# EAGLE board KallaxScreen (EAGLE 8.3.1)
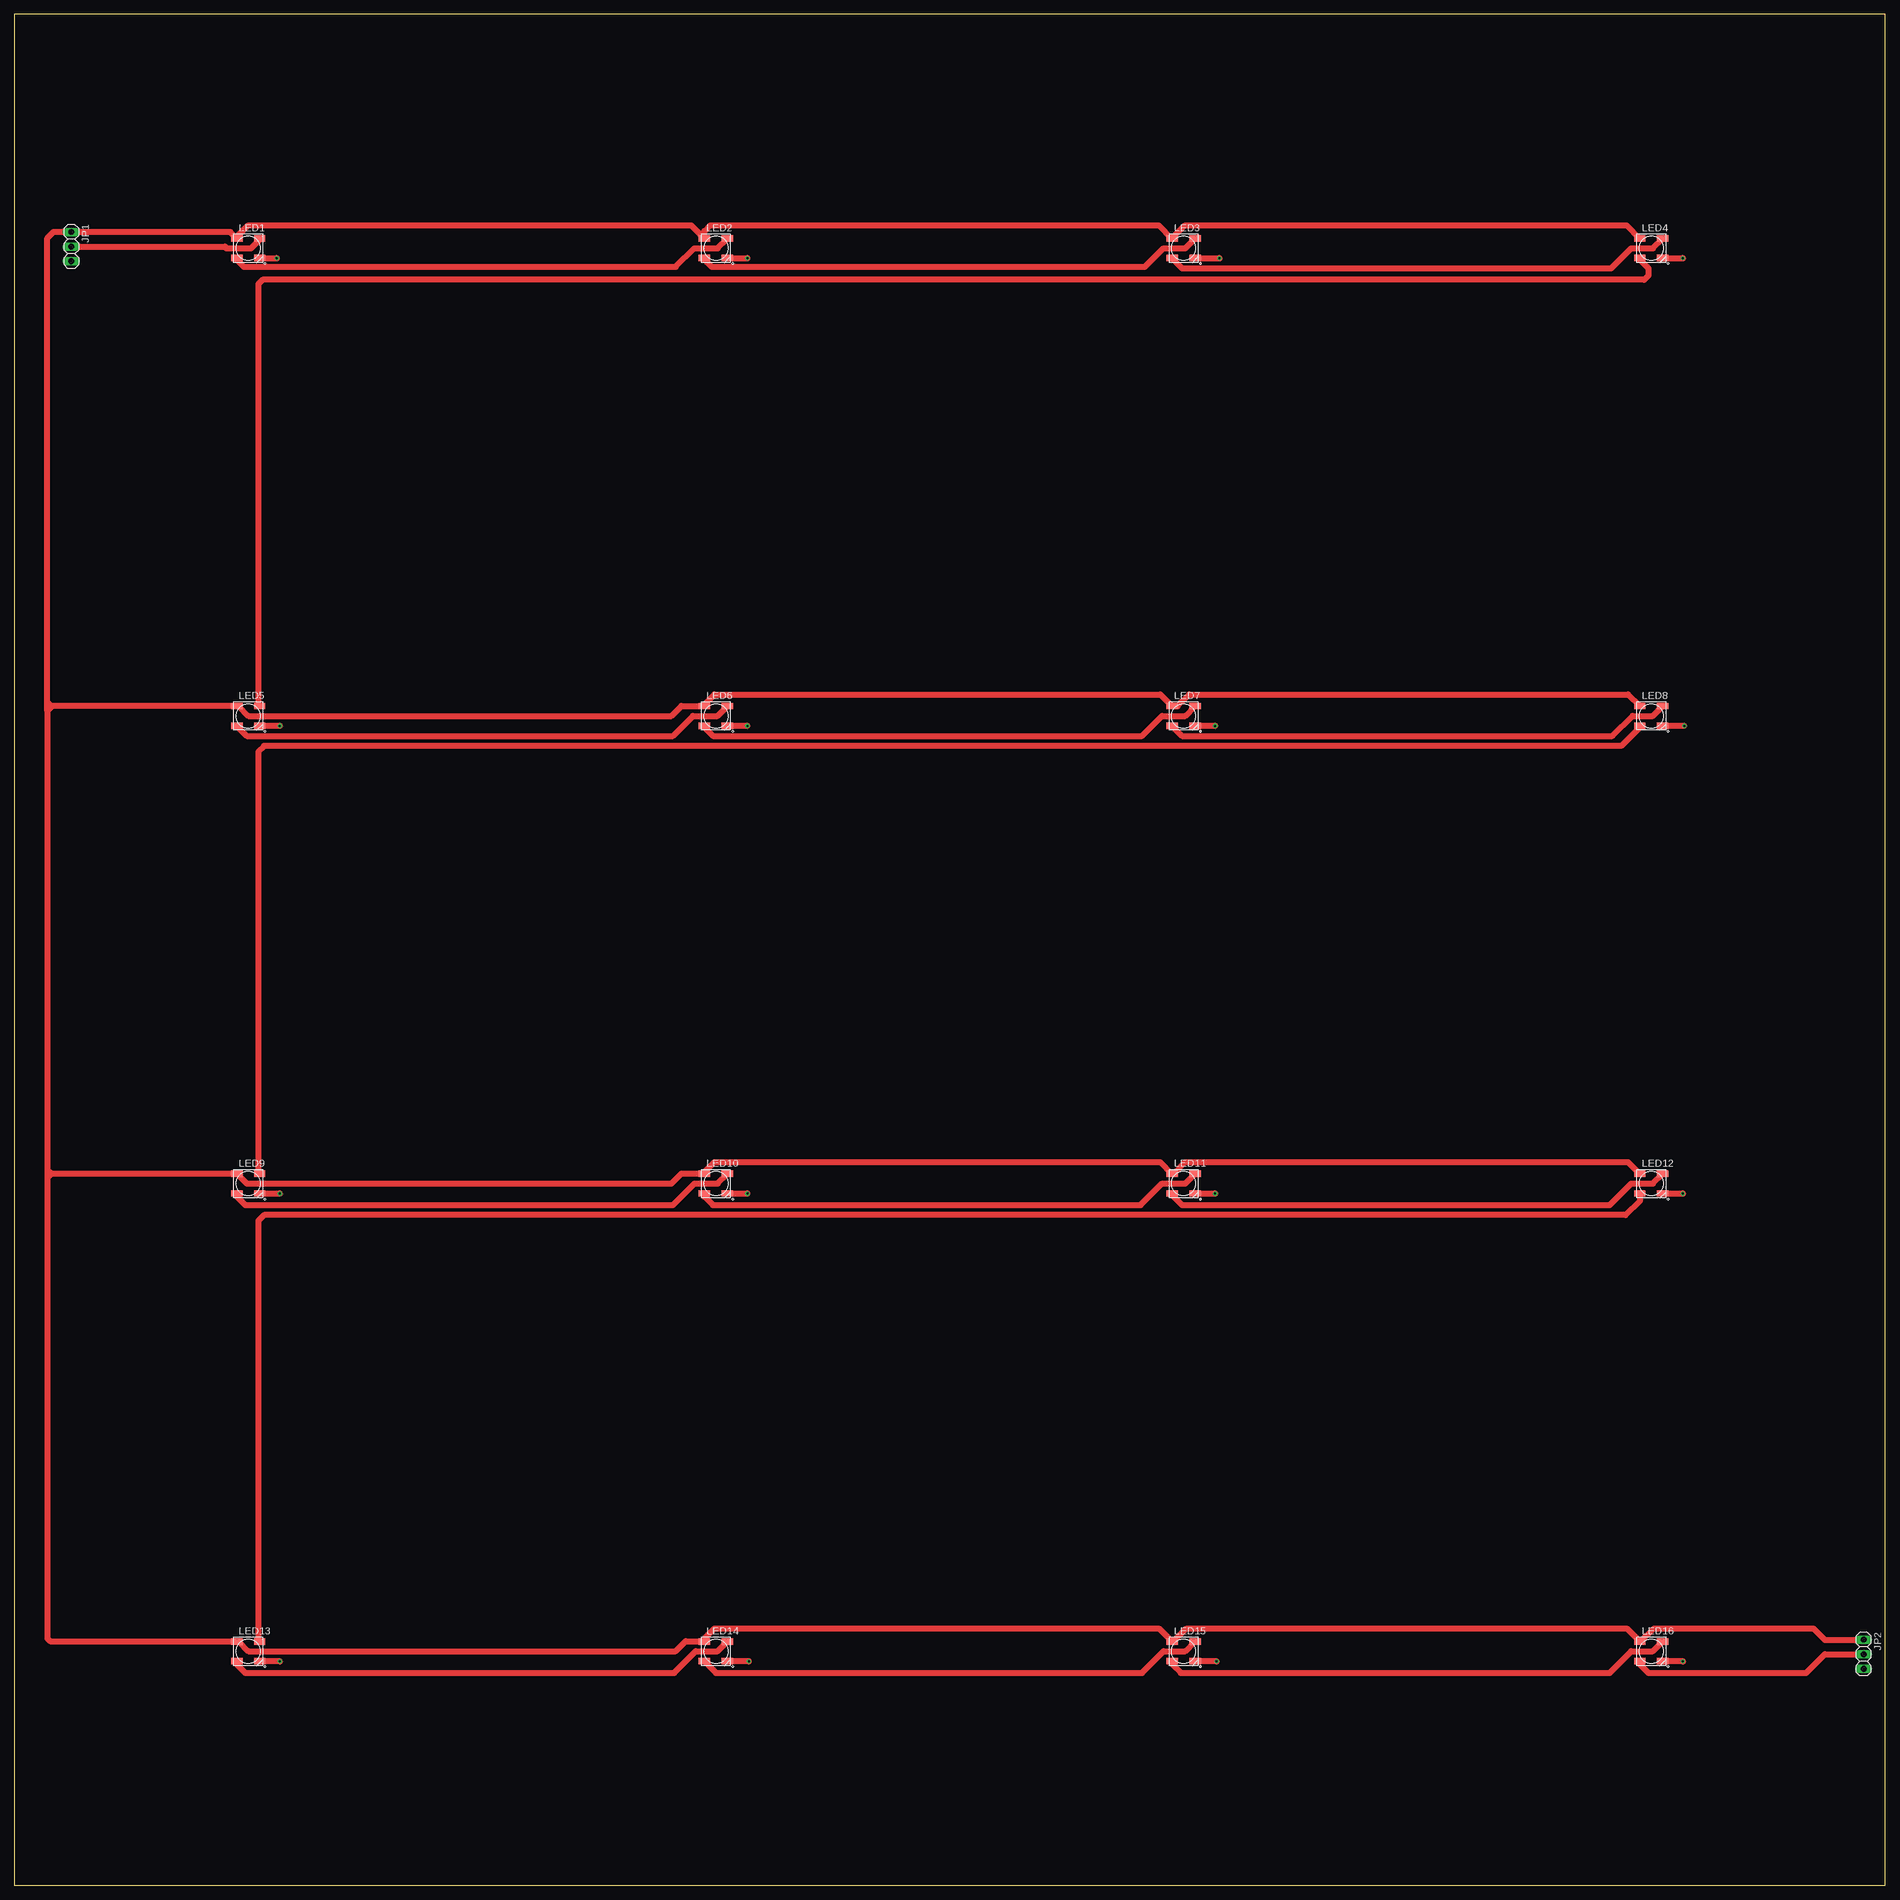
[diagram p0: board, top side]
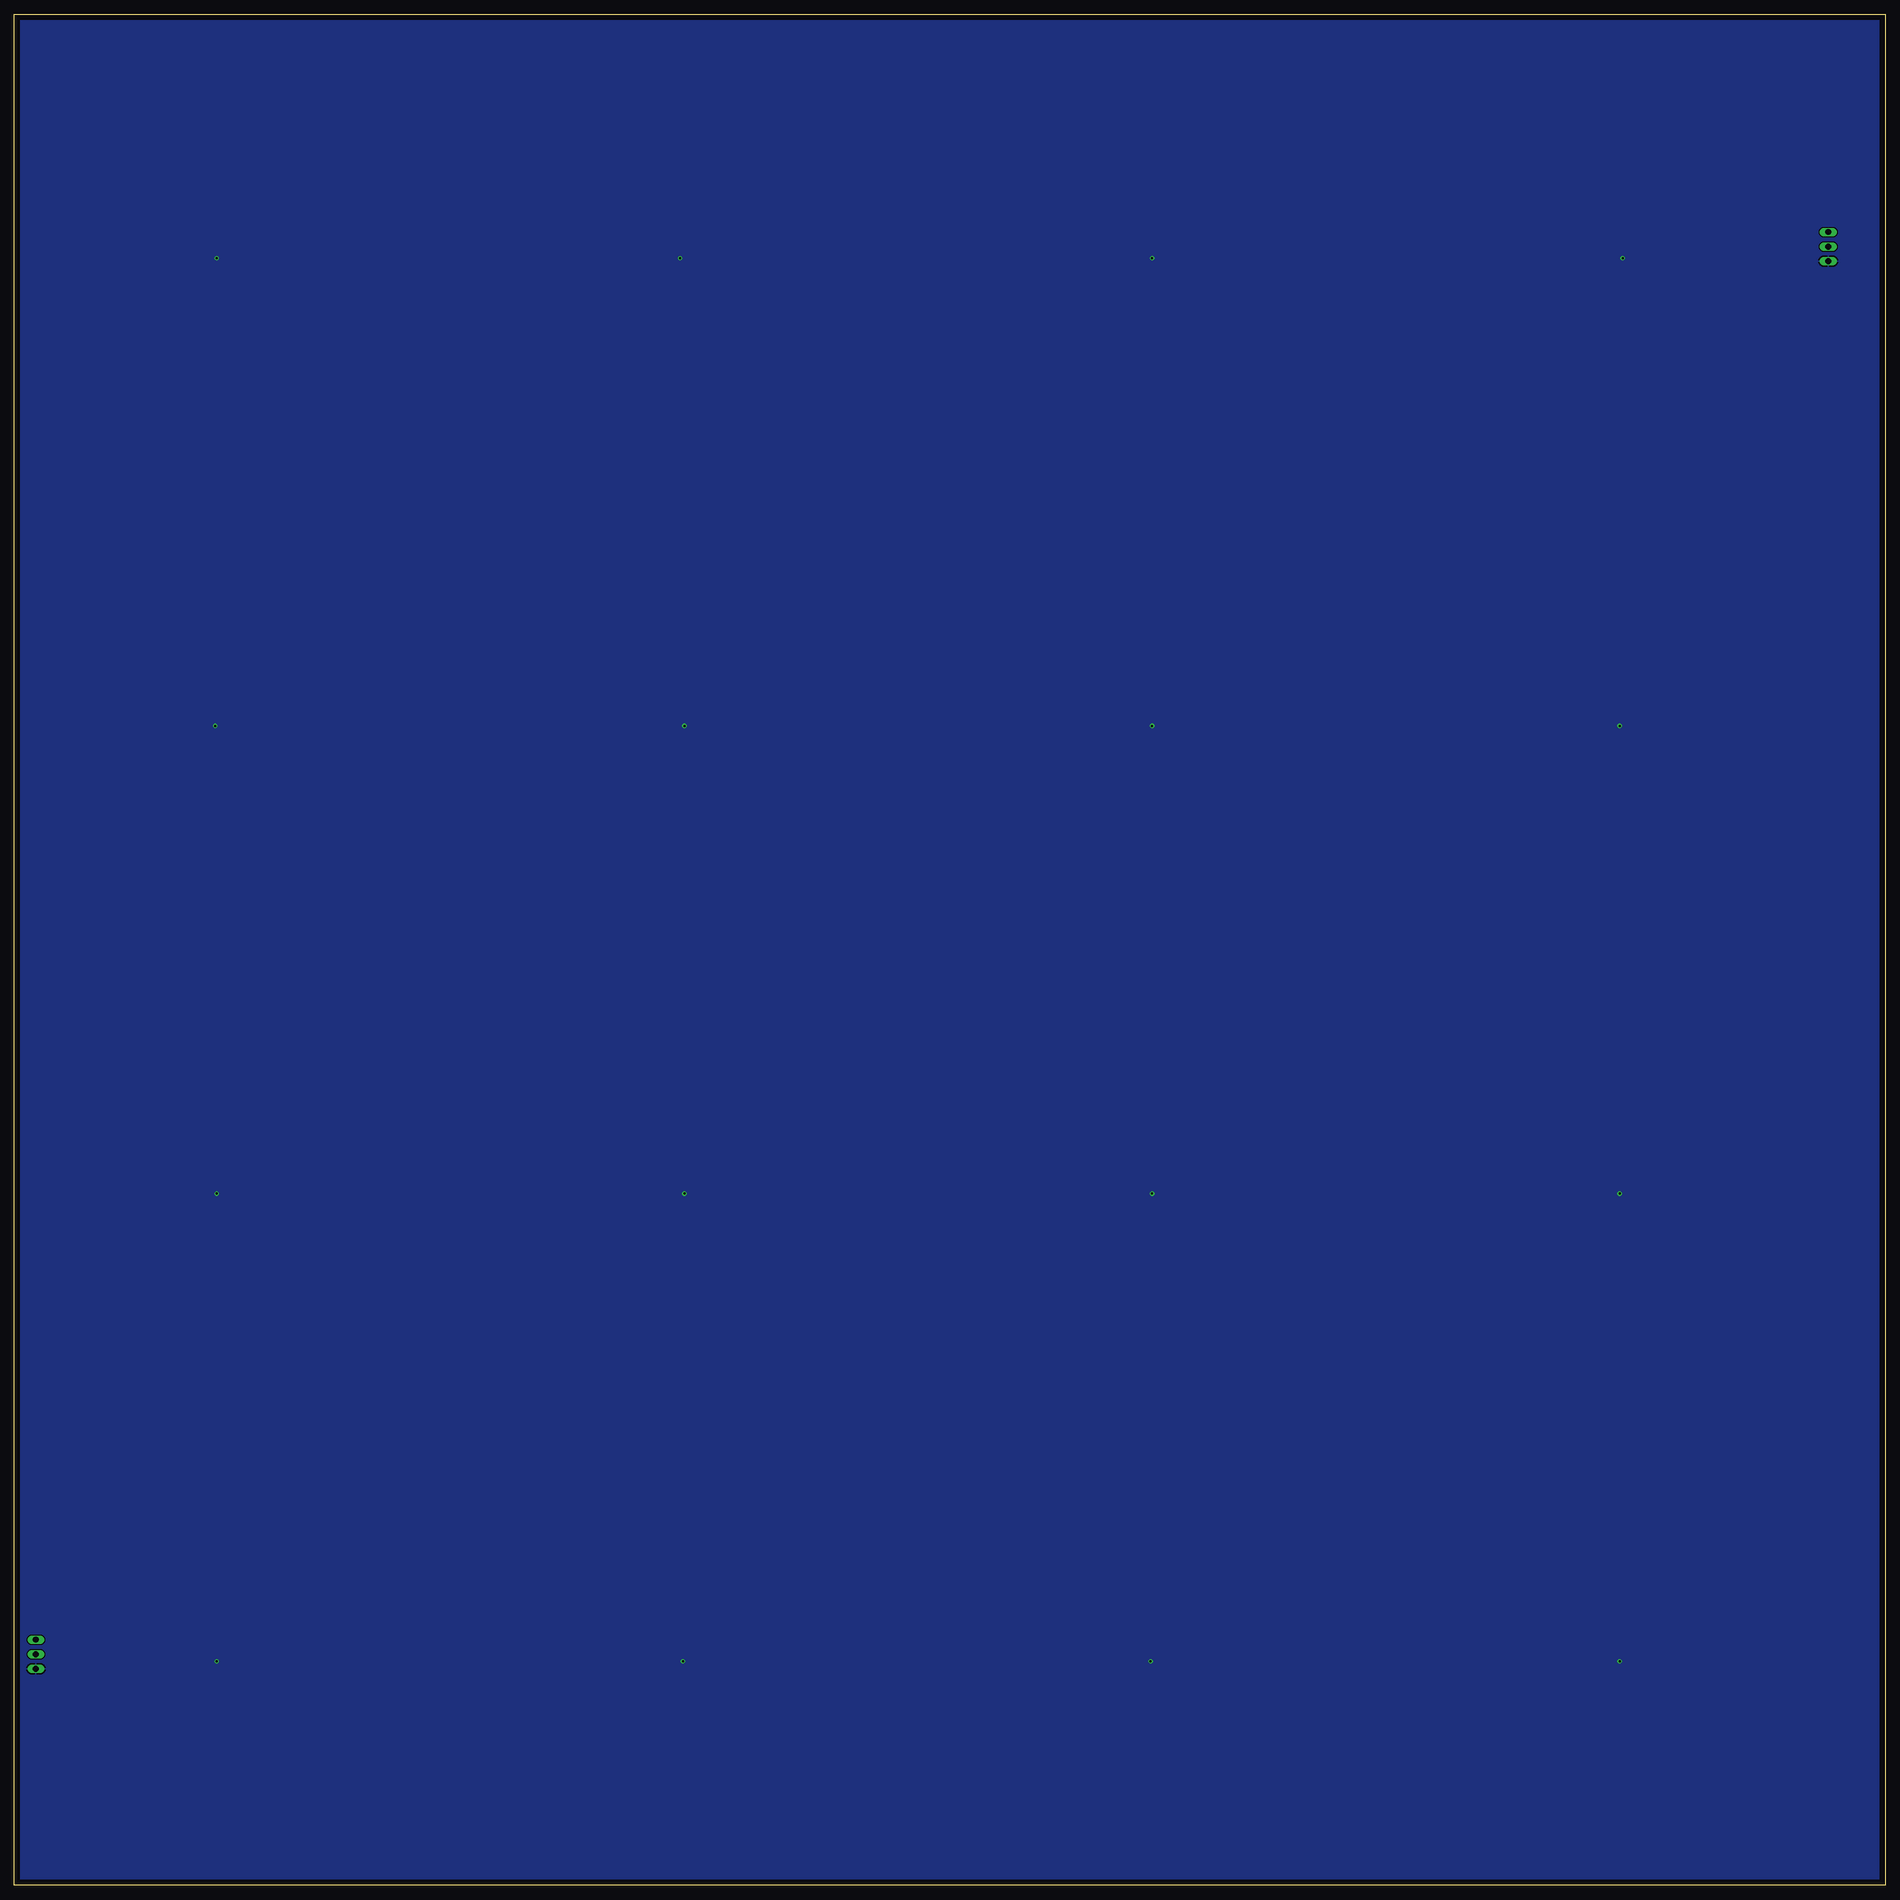
[diagram p1: board, bottom side, seen from below]

Size 326 x 326 mm. Coordinates in mm from the lower left corner, seen from the top.
Outline: 0,0 326,0 326,326 0,326 0,0
Copper layers (1*16): Top 0.035mm / dielectric 1.5mm / Bottom 0.035mm
Design rules "default": minimum track width 6mil, minimum drill 0.35mm, track to track 6mil, track to pad 6mil, pad to pad 6mil, via to via 6mil, smd to smd 6mil, copper to edge 40mil, drill to drill 6mil, minimum pad ring 10mil, minimum via ring 8mil, stop-mask expansion 4mil, vias tented up to drill 0mil, thermal gap 10mil

## Footprints (pad centres in the part's own frame; a part is rotated, then mirrored left to right if it is on the bottom)
1X03 = drill 1.016 long: 1 -2.54,0; 2 0,0; 3 2.54,0
WS2812B = smd 2 x 1.1: DIN 2,1.7; DOUT -2,-1.7; VDD -2,1.7; VSS 2,-1.7

## Placement (x,y rotation side)
JP1  [1X03]  9.93,285.53 270 top
JP2  [1X03]  322.25,40.25 270 top
LED1  WS2812B  [WS2812B]  40.75,285.25 0 top
LED2  WS2812B  [WS2812B]  122.25,285.25 0 top
LED3  WS2812B  [WS2812B]  203.75,285.25 0 top
LED4  WS2812B  [WS2812B]  285.25,285.25 0 top
LED5  WS2812B  [WS2812B]  40.75,203.75 0 top
LED6  WS2812B  [WS2812B]  122.25,203.75 0 top
LED7  WS2812B  [WS2812B]  203.75,203.75 0 top
LED8  WS2812B  [WS2812B]  285.25,203.75 0 top
LED9  WS2812B  [WS2812B]  40.75,122.25 0 top
LED10  WS2812B  [WS2812B]  122.25,122.25 0 top
LED11  WS2812B  [WS2812B]  203.75,122.25 0 top
LED12  WS2812B  [WS2812B]  285.25,122.25 0 top
LED13  WS2812B  [WS2812B]  40.75,40.75 0 top
LED14  WS2812B  [WS2812B]  122.25,40.75 0 top
LED15  WS2812B  [WS2812B]  203.75,40.75 0 top
LED16  WS2812B  [WS2812B]  285.25,40.75 0 top

## Library data of the parts
JP1 JP2 = pinhead
LED1-LED16 = WS2812B

## Nets
+5V: JP1.1 JP2.1 LED1.VDD LED2.VDD LED3.VDD LED4.VDD LED5.VDD LED6.VDD LED7.VDD LED8.VDD LED9.VDD LED10.VDD LED11.VDD LED12.VDD LED13.VDD LED14.VDD LED15.VDD LED16.VDD
GND: JP1.3 JP2.3 LED1.VSS LED2.VSS LED3.VSS LED4.VSS LED5.VSS LED6.VSS LED7.VSS LED8.VSS LED9.VSS LED10.VSS LED11.VSS LED12.VSS LED13.VSS LED14.VSS LED15.VSS LED16.VSS
N$1: LED1.DOUT LED2.DIN
N$2: LED2.DOUT LED3.DIN
N$3: LED3.DOUT LED4.DIN
N$4: LED4.DOUT LED5.DIN
N$5: LED5.DOUT LED6.DIN
N$6: LED6.DOUT LED7.DIN
N$7: LED7.DOUT LED8.DIN
N$8: LED8.DOUT LED9.DIN
N$9: LED9.DOUT LED10.DIN
N$10: LED10.DOUT LED11.DIN
N$11: LED11.DOUT LED12.DIN
N$12: LED12.DOUT LED13.DIN
N$13: LED13.DOUT LED14.DIN
N$14: LED14.DOUT LED15.DIN
N$15: LED15.DOUT LED16.DIN
N$16: JP2.2 LED16.DOUT
N$17: JP1.2 LED1.DIN

## Tracks (layer width: path | path; a pad name or v marks a point on that pad's centre or on a via)
+5V
  Top 1.016: LED4.VDD 280.95,289.25 204,289.25 201.75,287 LED3.VDD 199.45,289.25 121.25,289.25 120.25,288.25 LED2.VDD 117.95,289.25 40.75,289.25 38.75,287.25 LED1.VDD 37.63,288.07 JP1.1 6.82,288.07 5.75,287 5.75,206.17 | 5.75,204.59 5.75,206.17 | 5.75,204.59 5.75,124.75 | 6.5,124 5.75,124.75 | 6.5,124 38.7,124 LED9.VDD 38.8,123.95 40.5,122.25 114.5,122.25 116.25,124 120.2,124 LED10.VDD 120.25,124.25 122,126 199.7,126 LED11.VDD 201.95,123.95 204,126 281.2,126 LED12.VDD | 5.75,124.75 5.75,123.38 | 5.75,123.38 5.75,43 6.25,42.5 38.7,42.5 LED13.VDD 39.05,42.45 40.75,40.75 115.25,40.75 117,42.5 120.2,42.5 LED14.VDD 120.25,43 122,44.75 199.45,44.75 LED15.VDD 201.95,42.45 204.25,44.75 280.95,44.75 LED16.VDD 283.45,42.45 285.75,44.75 313.5,44.75 315.5,42.75 322.21,42.75 JP2.1 | 5.75,206.17 6.42,205.5 | 6.42,205.5 38.7,205.5 LED5.VDD 39.05,205.45 40.75,203.75 114.5,203.75 116.25,205.5 120.2,205.5 LED6.VDD 120.25,205.75 122,207.5 199.7,207.5 LED7.VDD 202.7,205.45 204.75,207.5 281.2,207.5 LED8.VDD | 6.42,205.5 6.42,205.26 5.75,204.59 | 5.75,123.38 5.88,123.38 6.5,124
GND  (via drill 0.35)
  Top 1.016: LED1.VSS 45.7,283.55 v45.75,283.5 | LED2.VSS 127.7,283.55 v127.75,283.5 | LED3.VSS 209.95,283.55 v210,283.5 | LED4.VSS 290.7,283.55 v290.75,283.5 | LED5.VSS 46.2,202.05 v46.25,202 | LED6.VSS 127.7,202.05 v127.75,202 | LED7.VSS 209.2,202.05 v209.25,202 | LED8.VSS 290.95,202.05 v291,202 | LED9.VSS 46.2,120.55 v46.25,120.5 | LED10.VSS 127.7,120.55 v127.75,120.5 | LED11.VSS 209.2,120.55 v209.25,120.5 | LED12.VSS 290.7,120.55 v290.75,120.5 | LED13.VSS 46.2,39.05 v46.25,39 | LED14.VSS 127.95,39.05 v128,39 | LED15.VSS 209.45,39.05 v209.5,39 | LED16.VSS 290.7,39.05 v290.75,39
  pour Bottom: 0,326 326,326 326,0 0,0
N$1
  Top 1.016: LED1.DOUT 38.75,283.25 40,282 115.25,282 118.5,285.25 122.55,285.25 LED2.DIN
N$2
  Top 1.016: LED2.DOUT 120.25,283.25 121.5,282 197,282 200.25,285.25 204.05,285.25 LED3.DIN
N$3
  Top 1.016: LED3.DOUT 201.75,283.5 203.5,281.75 278.25,281.75 281.75,285.25 285.55,285.25 LED4.DIN
N$4
  Top 1.016: LED4.DOUT 283.25,283.25 284.75,281.75 284.75,280.5 284,279.75 43.25,279.75 42.5,279 42.5,205.7 LED5.DIN
N$5
  Top 1.016: LED5.DOUT 38.75,202 40.5,200.25 114.75,200.25 118.25,203.75 122.55,203.75 LED6.DIN
N$6
  Top 1.016: LED6.DOUT 120.25,201.75 121.75,200.25 196.5,200.25 200,203.75 204.05,203.75 LED7.DIN
N$7
  Top 1.016: LED7.DOUT 201.75,202 203.5,200.25 278.5,200.25 282,203.75 285.55,203.75 LED8.DIN
N$8
  Top 1.016: LED8.DOUT 283.25,201.75 280,198.5 43.5,198.5 42.5,197.5 42.5,124.2 LED9.DIN
N$9
  Top 1.016: LED9.DOUT 38.75,120 40.25,118.5 114.75,118.5 118.5,122.25 122.55,122.25 LED10.DIN
N$10
  Top 1.016: LED10.DOUT 120.25,120 121.75,118.5 196.25,118.5 200,122.25 204.05,122.25 LED11.DIN
N$11
  Top 1.016: LED11.DOUT 201.75,120.25 203.5,118.5 278,118.5 281.75,122.25 285.55,122.25 LED12.DIN
N$12
  Top 1.016: LED12.DOUT 283.25,119.25 280.75,116.75 43.5,116.75 42.5,115.75 42.5,42.7 LED13.DIN
N$13
  Top 1.016: LED13.DOUT 38.75,38.5 40.25,37 115,37 118.75,40.75 122.55,40.75 LED14.DIN
N$14
  Top 1.016: LED14.DOUT 120.25,39 122.25,37 196.5,37 200.25,40.75 204.05,40.75 LED15.DIN
N$15
  Top 1.016: LED15.DOUT 201.75,38.5 203.25,37 278,37 281.75,40.75 285.55,40.75 LED16.DIN
N$16
  Top 1.016: LED16.DOUT 283.25,38.5 284.75,37 312.25,37 315.5,40.25 JP2.2
N$17
  Top 1.016: LED1.DIN 42.75,286.75 41.25,285.25 37,285.25 36.72,285.53 JP1.2